# Altium PCB WeatherStation.PcbDoc
Units mm, origin at the board's own origin, x right, y up, seen from the top; angles counter-clockwise.
Board outline 49.97 x 60 mm, 2 copper layers (Top Layer, Bottom Layer); 64 components, 54 nets, 305 pads, 43 vias.
Unrouted connection lines stored in the file: 75.
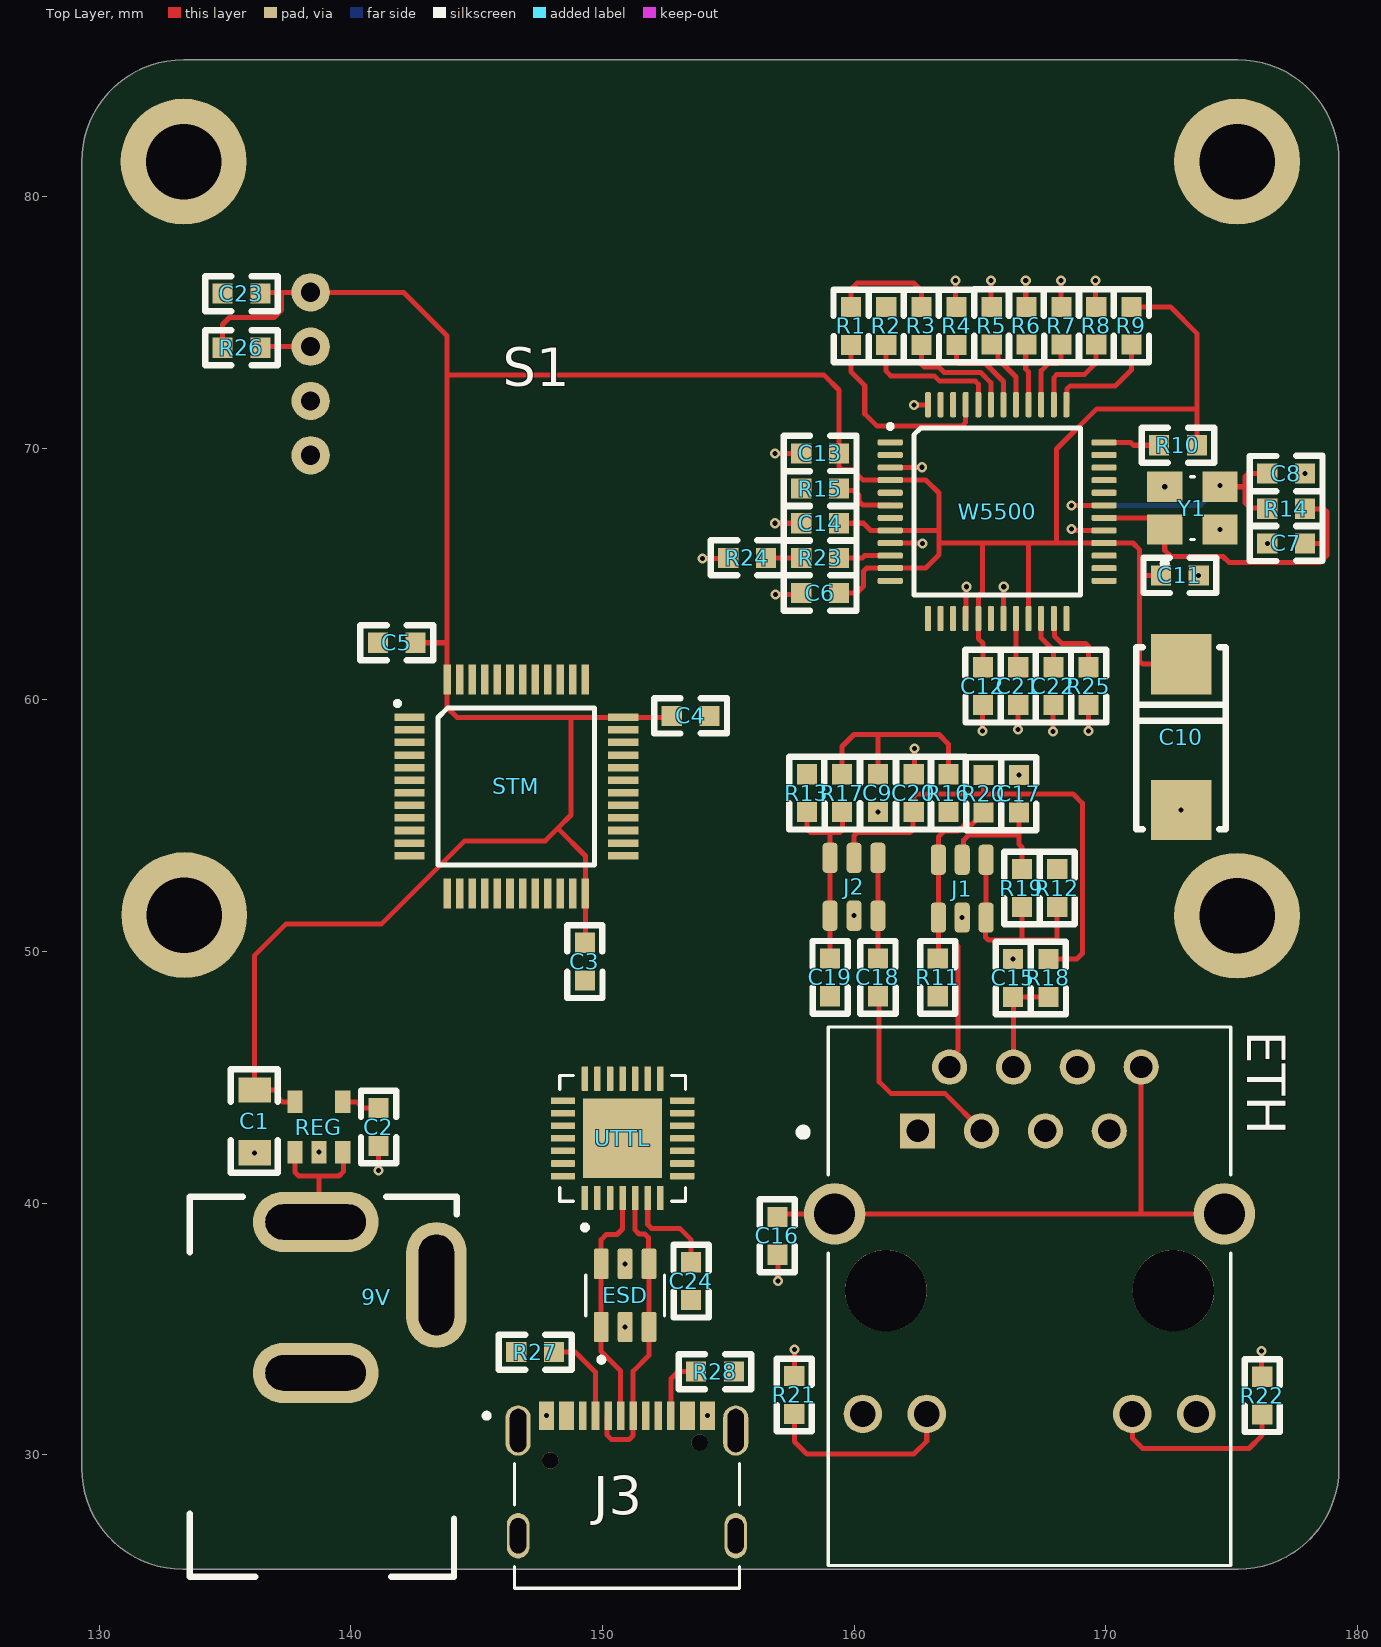
[diagram p0: Top Layer view]
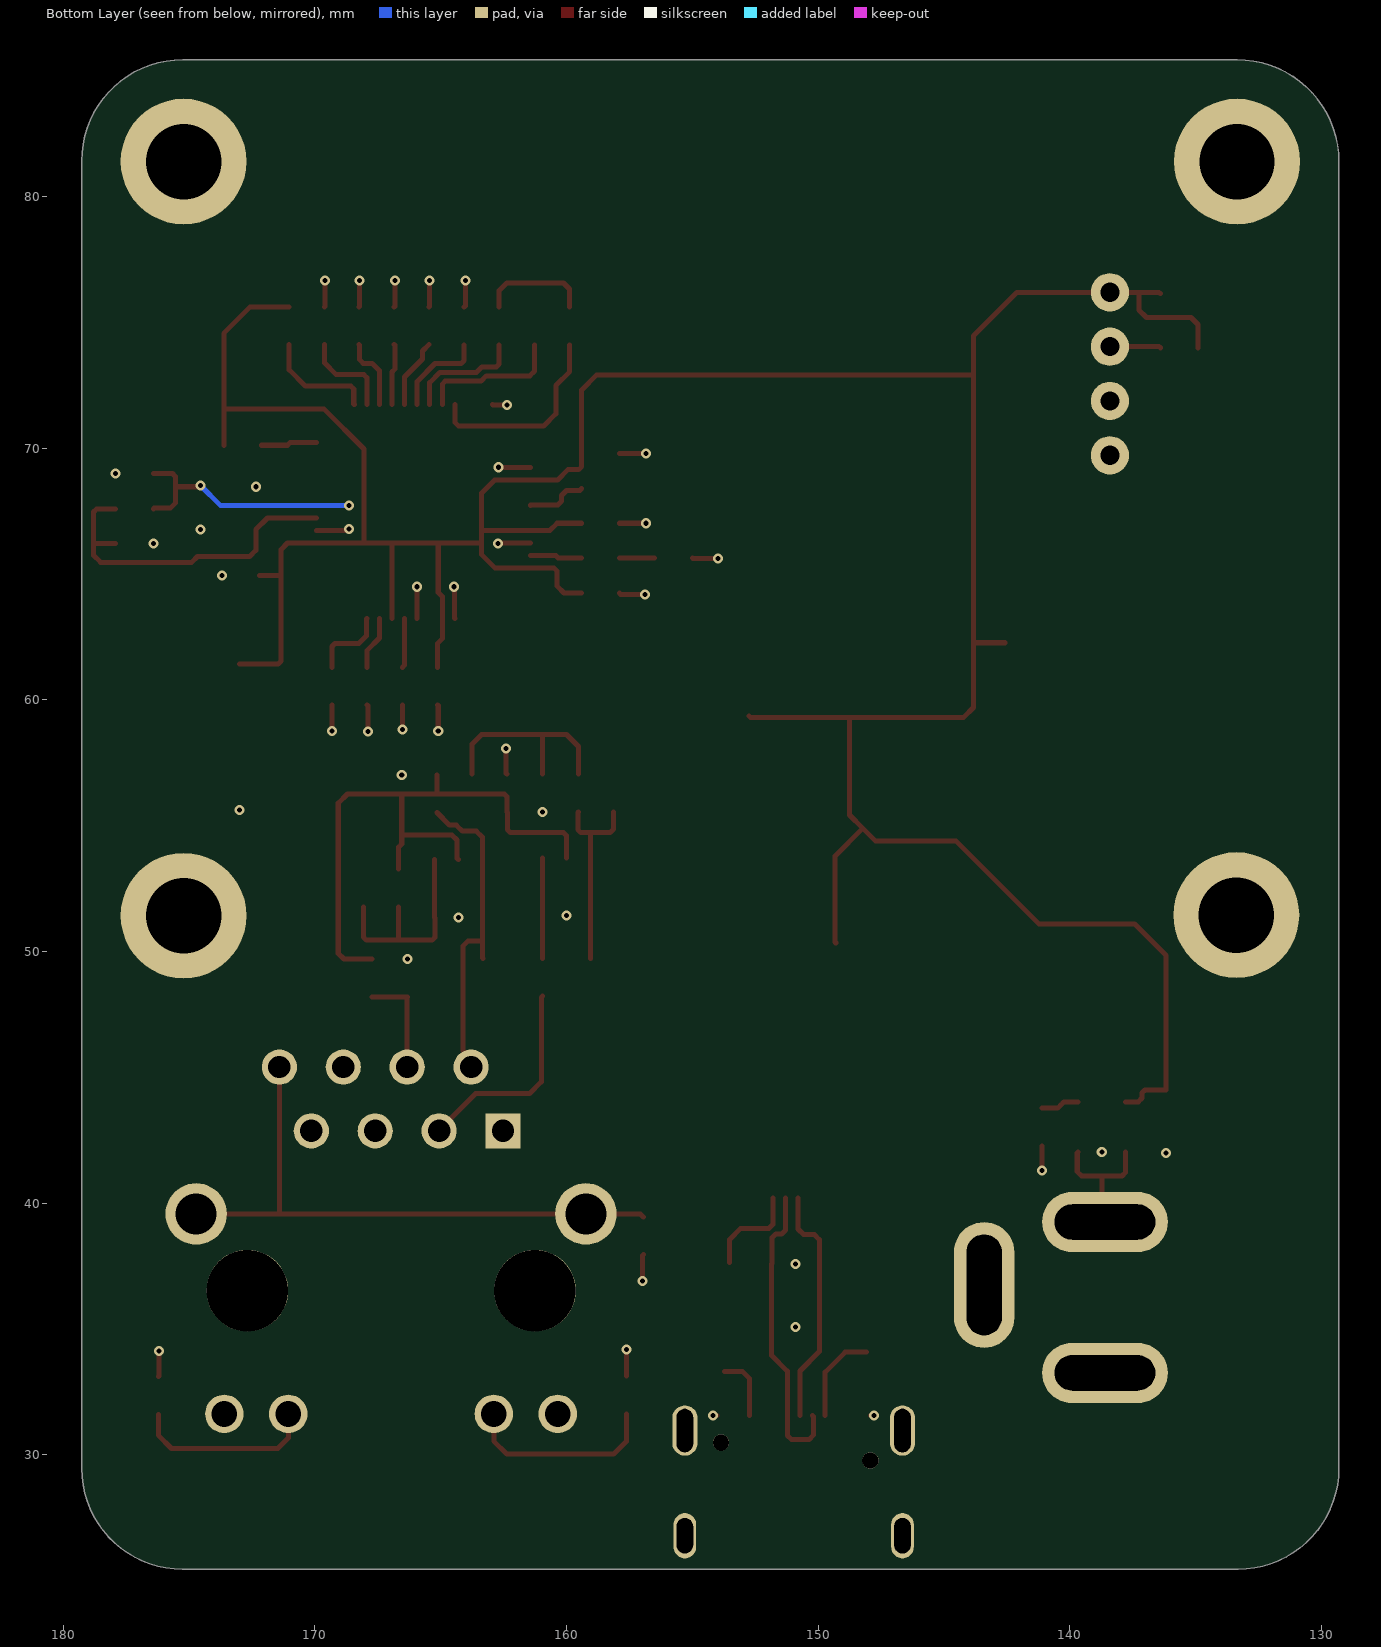
[diagram p1: Bottom Layer view, seen from below]
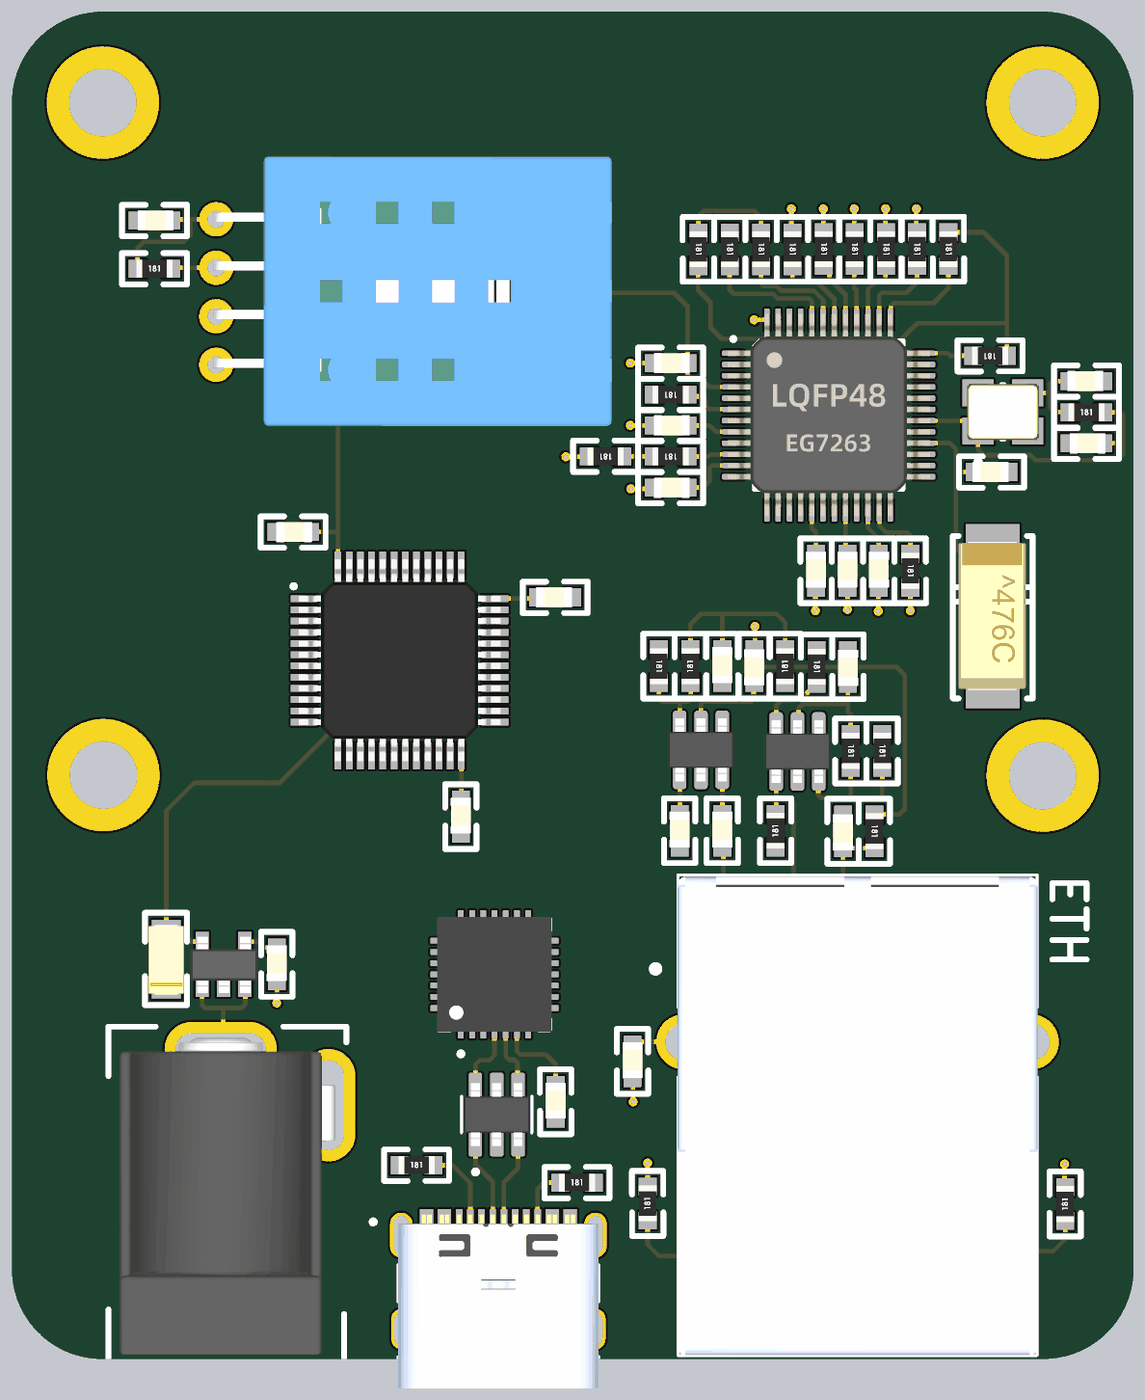
[diagram p2: 3D render of the assembled board from above, using the file's embedded part models]

## Layer stack, top to bottom
Top Solder: solder mask 0.0102, Solder Resist, Dk 3.5
Top Layer: signal copper 0.0356
Dielectric 1: dielectric 0.32, FR-4, Dk 4.8
Bottom Layer: signal copper 0.0356
Bottom Solder: solder mask 0.0102, Solder Resist, Dk 3.5

## Board outline
129.3,29.46 ccw(c133.31,29.46) 133.31,25.45 175.267,25.45 ccw(c175.267,29.455) 179.272,29.455 179.272,81.427 ccw(c175.249,81.427) 175.249,85.45 133.35,85.45 ccw(c133.35,81.4) 129.3,81.4

## Design rules (kind name [scope] priority, off if disabled: settings)
Clearance [All] p1: gap=0.254 ignorepadtopadclearanceinfootprint=FALSE except(0: Arc-Hole Track-Hole SMDPad-Hole THPad-Hole Via-Hole Fill-Hole Poly-Hole Region-Hole Text-Hole; 0.1: SMDPad-SMDPad; 0.15: Arc-Arc Arc-Track Arc-SMDPad Arc-THPad Arc-Via Arc-Fill Arc-Poly Arc-Region Track-Track Track-SMDPad Track-THPad Track-Via Track-Fill Track-Poly Track-Region SMDPad-THPad SMDPad-Via)
PolygonConnect [All] p1: connectstyle=Relief reliefconductorwidth=0.254 reliefentries=4 polygonreliefangle="90 Angle" airgapwidth=0.254
RoutingVias [All] p1: holewidth=0.711 width=1.27 viastyle="Through Hole" minholewidth=0.711 minwidth=1.27 maxholewidth=0.711 maxwidth=1.27
SolderMaskExpansion [All] p1: expansion=0.102 istentingtop=FALSE
Width [All] p1 off: maxlimit=0.254 minlimit=0.254 preferedwidth=0.254
30 further rules are at their usual default settings.

## Components (designator, comment, footprint, x,y, rotation, side; value= is the part's Value field where it differs from the comment)
9V "9V_jack" 9V_JACK 138.6,33.25 r90 top
C1 "2.2uF TAN CAP" "2.2uF TAN CAP" 136.175,42 r90 top
C2 "0603 CAP" "0603 CAP" 141.1,42.275 r90 top
C3 "100nf" "0603 CAP" 149.3,48.85 r90 top
C4 "100nf" "0603 CAP" 154.253,59.367 r180 top
C5 "100nf" "0603 CAP" 141.075,62.275 r0 top
C6 "0603 CAP" "0603 CAP" 157.9,64.25 r0 top
C7 "15pf" "0603 CAP" 176.425,66.225 r0 top
C8 "15pf" "0603 CAP" 177.925,69 r180 top
C9 "10nf" "0603 CAP" 160.95,55.55 r90 top
C10 "10uf" TANTAL_CAP 173,55.625 r90 top
C11 "100nf" "0603 CAP" 173.7,64.95 r180 top
C12 "100nf" "0603 CAP" 165.125,59.8 r90 top
C13 "100nf" "0603 CAP" 157.9,69.8 r0 top
C14 "100nf" "0603 CAP" 157.9,67.025 r0 top
C15 "22nf" "0603 CAP" 166.325,49.7 r270 top
C16 "10nf" "0603 CAP" 156.95,37.95 r90 top
C17 "100nf" "0603 CAP" 166.55,57.025 r270 top
C18 "10nf" "0603 CAP" 160.95,48.225 r90 top
C19 "10nf" "0603 CAP" 159.05,48.225 r90 top
C20 "100nf" "0603 CAP" 162.375,57.05 r270 top
C21 "4u7f" "0603 CAP" 166.525,59.8 r90 top
C22 "10nf" "0603 CAP" 167.925,59.8 r90 top
C23 "100nf" "0603 CAP" 134.9,76.15 r0 top
C24 "100nf" "0603 CAP" 153.525,36.15 r90 top
ESD "USBLC6-2SC6" SOT95P280X145-6N 150.9,36.33 r90 top
ETH "HR911105A" HANRUN_HR911105A 166.975,36.52 r180 top
J1 "USBLC6-4SC6" SOT23-6L 164.3,52.5 r0 top
J2 "USBLC6-4SC6" SOT23-6L 160,52.575 r0 top
J3 "CSP-USC16-TR" VALCON_CSP-USC16-TR 150.972,31.55 r0 top
R1 "10k" "0603 RES" 159.883,74.116 r90 top
R2 "10k" "0603 RES" 161.28,74.116 r90 top
R3 "10k" "0603 RES" 162.677,74.116 r90 top
R4 "10k" "0603 RES" 164.074,74.116 r90 top
R5 "10k" "0603 RES" 165.475,74.125 r90 top
R6 "10k" "0603 RES" 166.85,74.125 r90 top
R7 "10k" "0603 RES" 168.25,74.125 r90 top
R8 "10k" "0603 RES" 169.625,74.125 r90 top
R9 "10k" "0603 RES" 171.025,74.125 r90 top
R10 "0603 RES" "0603 RES" 172.125,70.125 r0 top
R11 "22R" "0603 RES" 163.325,49.725 r270 top
R12 "22R" "0603 RES" 168.075,51.775 r90 top
R13 "22R" "0603 RES" 158.125,55.55 r90 top
R14 "1M" "0603 RES" 177.925,67.6 r180 top
R15 "22R" "0603 RES" 157.9,68.4 r0 top
R16 "47R" "0603 RES" 163.75,57.05 r270 top
R17 "47R" "0603 RES" 159.525,57.05 r270 top
R18 "10R" "0603 RES" 167.725,48.2 r90 top
R19 "47R" "0603 RES" 166.675,51.775 r90 top
R20 "47R" "0603 RES" 165.15,55.525 r90 top
R21 "330R" "0603 RES" 157.625,33.125 r270 top
R22 "330R" "0603 RES" 176.225,33.1 r270 top
R23 "0603 RES" "0603 RES" 157.9,65.65 r0 top
R24 "0603 RES" "0603 RES" 155,65.65 r0 top
R25 "10K" "0603 RES" 169.325,59.8 r90 top
R26 "0603 RES" "0603 RES" 136.4,74 r180 top
R27 "0603 RES" "0603 RES" 148.075,34.075 r180 top
R28 "0603 RES" "0603 RES" 155.225,33.3 r180 top
REG "3.3v reg" "3.3v reg" 137.775,42.025 r0 top
S1 "DHT11" DHT11 138.4,76.205 r270 top
STM "STM32F103C8T6" STM32F103C8T6 142.324,59.311 r0 top
UTTL "CP2102" QFN50P500X500X100-29N 150.8,42.575 r90 top
W5500 "W5500" W5500 161.439,70.237 r0 top
Y1 "7M25090002" XTAL_7M25090002 173.45,67.625 r90 top

## Footprints (in the part's own frame and the unit in brackets; to place one, negate y for a bottom-side part, rotate by r counter-clockwise, add the part's x,y. Pads: shape width x height; smd on the part's side, far side on the other; paste and mask are expansions set on the pad)
"2.2uF TAN CAP" [mm]
  rect 1x1.3 smd: 1(0,0) 2(2.5,0)
  silkscreen extent -0.79,-0.93 3.32,0.95, body extent -0.33,-0.8 2.77,0.8, height 1.31
"3.3v reg" [mm]
  rect 0.6x0.9 smd: 1(0,0) 2(0.95,0) 3(1.9,0) 4(1.9,2) 5(0,2)
  body extent -0.52,-0.27 2.48,2.23, height 1.1
9V_JACK [mm]
  oval 2.4x5 hole 4 slot 1.4 at 0 deg: 1(6,0) 3(0,0)
  oval 5x2.4 hole 1.4 slot 4 at 0 deg: 2(3.5,-4.8)
  silkscreen extent -8.1,-5.6 7,5, body extent -7.6,-5.1 6.5,4.5, height 11
"0603 CAP" [mm]
  rect 0.8x0.8 smd: 1(0,0) 2(1.5,0)
  silkscreen extent -0.7,-0.7 2.2,0.7, body extent 0,-0.45 1.6,0.45, height 0.8
"0603 RES" [mm]
  rect 0.8x0.8 smd: 1(0,0) 2(1.5,0)
  silkscreen extent -0.7,-0.7 2.2,0.7, body extent -0.05,-0.4 1.55,0.4, height 0.45
DHT11 [mil]
  round 60 hole 30: 1(0,0) 2(85.04,0) 3(170.08,0) 4(255.12,0)
  body extent -110,-5 362,694, height 228
HANRUN_HR911105A [mm]
  rect 1.398x1.398 / inner round 1.398 / far side rect 1.398x1.398 hole 0.89: 1(4.45,-6.35)
  round 1.398 hole 0.89: 2(3.18,-8.89) 3(1.91,-6.35) 4(0.64,-8.89) 5(-0.63,-6.35) 6(-1.9,-8.89) 7(-3.17,-6.35) 8(-4.44,-8.89)
  round 1.53 hole 1.02: 9(6.625,4.9) 10(4.085,4.9) 11(-4.085,4.9) 12(-6.625,4.9)
  round 2.445 hole 1.63: 15(7.745,-3.05) 16(-7.745,-3.05)
  round 3.25 hole 3.25 unplated: ""(-5.715,0) ""(5.715,0)
  silkscreen extent -8,-10.48 9.15,10.92, body extent -8.02,-10.4 8.02,10.9, height 13.5
QFN50P500X500X100-29N [mm]
  rrect25% 0.97x0.26 smd: 1(-2.37,1.5) 2(-2.37,1) 3(-2.37,0.5) 4(-2.37,0) 5(-2.37,-0.5) 6(-2.37,-1) 7(-2.37,-1.5) 15(2.37,-1.5) 16(2.37,-1) 17(2.37,-0.5) 18(2.37,0) 19(2.37,0.5) 20(2.37,1) 21(2.37,1.5)
  rrect25% 0.26x0.97 smd: 8(-1.5,-2.37) 9(-1,-2.37) 10(-0.5,-2.37) 11(0,-2.37) 12(0.5,-2.37) 13(1,-2.37) 14(1.5,-2.37) 22(1.5,2.37) 23(1,2.37) 24(0.5,2.37) 25(0,2.37) 26(-0.5,2.37) 27(-1,2.37) 28(-1.5,2.37)
  rect 3.15x3.15 smd paste-0.575: 29(0,0)
  silkscreen extent -3.64,-2.5 2.5,2.5, body extent -2.55,-2.55 2.55,2.55, height 1
SOT23-6L [mm]
  rrect50% 0.6x1.2 smd: 1(-0.95,-1.15) 2(0,-1.15) 3(0.95,-1.15) 4(0.95,1.15) 5(0,1.15) 6(-0.95,1.15)
  body extent -1.46,-1.4 1.46,1.4, height 1.4
SOT95P280X145-6N [mm]
  rrect25% 1.21x0.59 smd: 1(-1.255,0.95) 2(-1.255,0) 3(-1.255,-0.95) 4(1.255,-0.95) 5(1.255,0) 6(1.255,0.95)
  silkscreen extent -2.65,-1.57 0.81,1.57, body extent -1.4,-1.46 1.4,1.46, height 1.4
STM32F103C8T6 [mm]
  rect 1.2x0.3 smd: 1(0,0) 2(0,-0.5) 3(0,-1) 4(0,-1.5) 5(0,-2) 6(0,-2.5) 7(0,-3) 8(0,-3.5) 9(0,-4) 10(0,-4.5) 11(0,-5) 12(0,-5.5) 25(8.5,-5.5) 26(8.5,-5) 27(8.5,-4.5) 28(8.5,-4) 29(8.5,-3.5) 30(8.5,-3) 31(8.5,-2.5) 32(8.5,-2) 33(8.5,-1.5) 34(8.5,-1) 35(8.5,-0.5) 36(8.5,0)
  rect 0.3x1.2 smd: 13(1.5,-7) 14(2,-7) 15(2.5,-7) 16(3,-7) 17(3.5,-7) 18(4,-7) 19(4.5,-7) 20(5,-7) 21(5.5,-7) 22(6,-7) 23(6.5,-7) 24(7,-7) 37(7,1.5) 38(6.5,1.5) 39(6,1.5) 40(5.5,1.5) 41(5,1.5) 42(4.5,1.5) 43(4,1.5) 44(3.5,1.5) 45(3,1.5) 46(2.5,1.5) 47(2,1.5) 48(1.5,1.5)
  silkscreen extent -0.53,-5.86 7.36,0.61, body extent -0.25,-7.25 8.75,1.75, height 1.6
TANTAL_CAP [mm]
  rect 2.4x2.4 smd: 1(0,0) 2(5.8,0)
  silkscreen extent -0.76,-1.78 6.48,1.78, body extent -0.38,-1.48 6.22,1.52, height 2.38
VALCON_CSP-USC16-TR [mm]
  rect 0.3x1.14 smd: A1(-3.35,0) A4(-2.55,0) A5(-1.25,0) A6(-0.25,0) A7(0.25,0) A8(1.25,0) A9(2.55,0) A12(3.35,0) B1(3.05,0) B4(2.25,0) B5(1.75,0) B6(0.75,0) B7(-0.75,0) B8(-1.75,0) B9(-2.25,0) B12(-3.05,0)
  oval 1x2 hole 0.65 slot 1.72 at 90 deg: S1(-4.325,-0.59) S2(4.325,-0.59)
  oval 0.9x1.8 hole 0.65 slot 1.4 at 90 deg: S3(-4.325,-4.77) S4(4.325,-4.77)
  round 0.65 hole 0.65 unplated: ""(-3.048,-1.778) ""(2.89,-1.07)
  silkscreen extent -5.67,-6.86 4.47,0.1, body extent -4.47,-7.42 4.47,0.33, height 3.26
W5500 [mm]
  rrect50% 1x0.24 smd: 1(0,0) 2(0,-0.5) 3(0,-1) 4(0,-1.5) 5(0,-2) 6(0,-2.5) 7(0,-3) 8(0,-3.5) 9(0,-4) 10(0,-4.5) 11(0,-5) 12(0,-5.5) 25(8.5,-5.5) 26(8.5,-5) 27(8.5,-4.5) 28(8.5,-4) 29(8.5,-3.5) 30(8.5,-3) 31(8.5,-2.5) 32(8.5,-2) 33(8.5,-1.5) 34(8.5,-1) 35(8.5,-0.5) 36(8.5,0)
  rrect50% 0.24x1 smd: 13(1.5,-7) 14(2,-7) 15(2.5,-7) 16(3,-7) 17(3.5,-7) 18(4,-7) 19(4.5,-7) 20(5,-7) 21(5.5,-7) 22(6,-7) 23(6.5,-7) 24(7,-7) 37(7,1.5) 38(6.5,1.5) 39(6,1.5) 40(5.5,1.5) 41(5,1.5) 42(4.5,1.5) 43(4,1.5) 44(3.5,1.5) 45(3,1.5) 46(2.5,1.5) 47(2,1.5) 48(1.5,1.5)
  silkscreen extent -0.05,-6.06 7.56,0.68, body extent -0.26,-7.26 8.76,1.76, height 1.6
XTAL_7M25090002 [mm]
  rect 1.2x1.4 smd: 1(-0.85,1.1) 2(-0.85,-1.1) 3(0.85,-1.1) 4(0.85,1.1)
  silkscreen extent -2.3,-0.08 1.25,1.2, body extent -1.25,-1.6 1.25,1.6, height 0.8

## Part data
9V: library part 9V_JACK
C3 C4 C5 C7 C8 C9 C11 C12 C13 C14 C15 C16 C17 C18 C19 C20 C21 C22 C23 C24: library part "0603 CAP"
C10: library part tan_cap
ESD: "17V Clamp 5A (8/20Âµs) Ipp Tvs Diode Surface Mount SOT-23-6", Package="SOT-23-6 STMicroelectronics", Availability="In Stock", Check_prices=https://www.snapeda.com/parts/USBLC6-2SC6/STMicroelectronics/view-part/?ref=eda, MF=STMicroelectronics, MP=USBLC6-2SC6, Price=None, Purchase-URL=https://pricing.snapeda.com/search/part/USBLC6-2SC6/?ref=eda, SnapEDA_Link=https://www.snapeda.com/parts/USBLC6-2SC6/STMicroelectronics/view-part/?ref=snap
ETH: "DIP RJ45 Connector;", Package=None, Availability="Not in stock", Check_prices=https://www.snapeda.com/parts/HR911105A/HanRun/view-part/?ref=eda, MF=hanrun, MP=HR911105A, Price=None, SnapEDA_Link=https://www.snapeda.com/parts/HR911105A/HanRun/view-part/?ref=snap
J1 J2: "17V Clamp 5A (8/20µs) Ipp Tvs Diode Surface Mount SOT-23-6", Package="SOT-23-6 STMicroelectronics", Check_prices=https://www.snapeda.com/parts/USBLC6-4SC6/STMicroelectronics/view-part/?ref=eda, MF=STMicroelectronics, MP=USBLC6-4SC6, SnapEDA_Link=https://www.snapeda.com/parts/USBLC6-4SC6/STMicroelectronics/view-part/?ref=snap
J3: "CSP-USC16-TR Valcon USB Type C Surface Mount PCB Socket", Package=None, Availability="In Stock", Check_prices=https://www.snapeda.com/parts/CSP-USC16-TR/Valcon/view-part/?ref=eda, MF=Valcon, MP=CSP-USC16-TR, Price=None, Purchase-URL=https://pricing.snapeda.com/search/part/CSP-USC16-TR/?ref=eda, SnapEDA_Link=https://www.snapeda.com/parts/CSP-USC16-TR/Valcon/view-part/?ref=snap
R1 R2 R3 R4 R5 R6 R7 R8 R9 R11 R12 R13 R14 R15 R16 R17 R18 R19 R20 R21 R22 R25: library part "0603 RES"
UTTL: "CP2102N USB 2.0 to UART (RS232) Bridge Interface Evaluation Board", Package="WFQFN-20 Silicon Labs", Availability="In Stock", Check_prices=https://www.snapeda.com/parts/CP2102/Silicon+Labs/view-part/?ref=eda, MF="Silicon Labs", MP=CP2102, Price=None, Purchase-URL=https://pricing.snapeda.com/search/part/CP2102/?ref=eda, SnapEDA_Link=https://www.snapeda.com/parts/CP2102/Silicon+Labs/view-part/?ref=snap
Y1: "25 MHz Â±10ppm Crystal 18pF 4-SMD, No Lead", Package="SMD-4 TXC", Availability="In Stock", Check_prices=https://www.snapeda.com/parts/7M25090002/TXC/view-part/?ref=eda, MF=TXC, MP=7M25090002, Price=None, Purchase-URL=https://pricing.snapeda.com/search/part/7M25090002/?ref=eda, SnapEDA_Link=https://www.snapeda.com/parts/7M25090002/TXC/view-part/?ref=snap

## Free pads (board coordinates)
  round 5 hole 3: 21(133.35,81.4) 21(133.375,51.45) 21(175.225,51.425) 21(175.225,81.4)

## Via types
v1: diameter 0.4, hole 0.2, Top Layer to Bottom Layer, 43 vias

## Nets (pads, with @x,y where several pads share a name; then routed paths per layer and width w, separated by ;. In a path a pad name is that pad's centre, name@x,y a point inside that pad or via, vN(x,y) a via of type N, cw(c..) or ccw(c..) an arc to the next point about the centre after c; other vN are vias at no path point)
3.3V: C1.2 C3.2 C4.2 C5.2 C6.2 C10.2 C11.2 C12.2 C13.2 C14.2 C23.2 R9.2 R10.2 R26.2 REG.5 S1.1 STM.24 STM.36 STM.48 W5500.4 W5500.8 W5500.11 W5500.15 W5500.17 W5500.21 W5500.28 | length 145.6
  Top Layer w0.2: R26.2 134.9,74.925 135.175,75.2 136.95,75.2 137.25,75.5 137.25,76.18 137.225,76.205 ; C23.2 136.455,76.205 137.225,76.205 ; REG.5 137.275,44.025 137.125,44.175 137.125,44.383 137.008,44.5 C1.2 136.175,49.85 137.425,51.1 141.225,51.1 144.525,54.4 147.725,54.4 148.225,54.9 ; C5.2 143.725,62.275 ; 149.15,59.3 150.813,59.3 STM.36 ; C3.2 149.324,50.374 STM.24 149.324,53.801 148.225,54.9 ; C4.2 152.697,59.311 STM.36 ; C6.2 160.1,64.25 160.375,64.525 160.375,65.12 160.492,65.237 W5500.11 162.837,65.237 163.375,65.775 163.375,66.331 ; C14.2 160.375,67.025 160.663,66.737 W5500.8 163.375,66.737 ; 165.1,66.225 165.1,64.275 164.939,64.114 W5500.17 164.939,62.436 165.125,62.25 C12.2 ; W5500.21 166.939,66.223 166.925,66.237 ; W5500.28@169.939,66.236 171.088,66.236 171.353,65.972 171.353,64.95 ; W5500.28 168.05,66.237 ; R9.2 172.575,75.625 173.625,74.575 173.625,71.575 ; C11.2 171.353,64.95 ; C10.2 171.47,61.425 171.353,61.542 171.353,64.95 ; R10.2 173.625,71.575 ; 137.225,76.205 S1.1 142.095,76.205 143.824,74.476 143.824,72.975 ; 143.824,72.975 STM.48 143.824,59.701 144.214,59.311 148.75,59.311 ; 143.824,72.975 143.874,72.925 158.8,72.925 159.4,72.325 C13.2 159.4,69.271 159.517,69.154 159.947,69.154 160.364,68.737 W5500.4 162.863,68.737 163.375,68.225 163.375,66.737 ; 148.225,54.9 148.75,55.425 148.75,59.311 ; 148.75,59.311 STM.36 ; 163.375,66.331 163.375,66.737 ; 163.375,66.331 163.469,66.237 166.925,66.237 ; 166.925,66.237 168.05,66.237 ; 168.05,66.237 168.05,69.975 169.65,71.575 173.625,71.575
3.3Va: C17.2 C20.2 J1.5 J2.5 R1.2 R3.2 R18.2 R19.2 R20.2 | length 30.3
  Top Layer w0.2: R1.2 159.883,76.333 160.125,76.575 162.375,76.575 162.677,76.273 R3.2 ; J2.5 160,54.608 160.117,54.725 162.233,54.725 162.35,54.842 162.35,55.525 C20.2 162.375,56.165 162.475,56.265 165.15,56.265 ; J1.5 164.356,53.706 164.356,54.431 164.55,54.625 166.55,54.625 ; R20.2@165.155,57.02 R20.2 165.15,56.265 ; R19.2 166.675,54.15 166.55,54.275 166.55,54.625 ; R18.2 168.85,49.7 169.075,49.925 169.075,55.9 168.71,56.265 166.525,56.265 ; 165.15,56.265 166.525,56.265 ; 166.525,56.265 166.55,56.24 C17.2 166.55,54.625
9v: 9V.1 REG.1 REG.3 | length 5.5
  Top Layer w0.2: REG.1 137.775,41.225 137.925,41.075 138.725,41.075 ; 9V.1 9V.1@138.9,39.55 ; 9V.1@138.725,39.675 138.725,41.075 ; REG.3 139.7,42 139.7,41.25 139.525,41.075 138.725,41.075
ACTLED: ETH.12 W5500.27
D+: ESD.1 ESD.6 J3.A6 J3.B6 UTTL.4 | length 9.6
  Top Layer w0.2: J3.A6 150.722,33.328 149.95,34.1 ESD.1 149.95,35.925 ESD.6 149.95,38.55 150.15,38.75 150.575,38.75 150.8,38.975 UTTL.4
D-: ESD.3 ESD.4 J3.A7 J3.B7 UTTL.5 | length 12
  Top Layer w0.2: J3.B7 150.188,31.516 150.188,30.775 150.366,30.597 151.054,30.597 151.222,30.765 J3.A7 151.222,33.322 151.85,33.95 ESD.3 ESD.4 151.825,37.61 151.825,38.63 151.68,38.775 151.45,38.775 151.3,38.925 UTTL.5
DHT11_PIN: R26.1 S1.2 | length 2
  Top Layer w0.2: R26.1 136.445,74.045 S1.2
GND: 9V.2 9V.3 C1.1 C2.1 C3.1 C4.1 C5.1 C6.1 C7.1 C8.1 C9.1 C10.1 C11.1 C12.1 C13.1 C14.1 C15.1 C16.1 C17.1 C20.1 C21.1 C22.1 C23.1 C24.1 ESD.2 ESD.5 J1.2 J2.2 J3.A1 J3.A12 J3.B1 J3.B12 J3.S1 J3.S2 J3.S3 J3.S4 R4.2 R5.2 R6.2 R7.2 R8.2 R21.1 R22.1 R24.1 R25.1 R27.2 R28.1 REG.2 S1.4 STM.23 STM.35 STM.47 UTTL.3 UTTL.29 W5500.3 W5500.9 W5500.14 W5500.16 W5500.19 W5500.29 W5500.48 Y1.2 Y1.4 | length 25.8
  Top Layer w0.2: v1(141.1,41.3) C2.1 ; v1(153.975,65.625) 154.975,65.625 R24.1 ; v1(156.85,67.025) C14.1 ; v1(156.85,69.8) C13.1 ; v1(156.875,64.2) 157.85,64.2 C6.1 ; C16.1 156.975,37.925 v1(156.975,36.9) ; R21.1 v1(157.625,34.175) ; W5500.9 161.445,66.231 162.719,66.231 v1(162.725,66.225) ; W5500.3 161.446,69.243 162.693,69.243 v1(162.7,69.25) ; C20.1 162.4,57.075 v1(162.4,58.071) ; v1(162.375,71.725) 162.927,71.725 W5500.48 ; v1(164.025,76.675) 164.025,75.665 R4.2 ; W5500.16 164.457,63.255 164.457,64.482 v1(164.475,64.5) ; v1(165.1,58.775) 165.1,59.775 C12.1 ; v1(165.45,76.675) 165.45,75.65 R5.2 ; W5500.19 165.945,63.242 165.945,64.495 v1(165.95,64.5) ; C17.1@166.525,57.05 v1(166.55,57.025) ; v1(166.525,58.825) C21.1 ; v1(166.825,76.675) 166.825,75.65 R6.2 ; v1(167.9,58.75) 167.9,59.775 C22.1 ; v1(168.225,76.675) 168.225,75.65 R7.2 ; v1(168.65,66.791) 168.71,66.731 169.933,66.731 W5500.29 ; v1(169.325,58.775) R25.1 ; v1(169.6,76.675) 169.6,75.65 R8.2 ; v1(176.2,34.125) 176.2,33.125 R22.1
  other v1: 147.772,31.55 154.172,31.55 150.9,35.075 150.9,37.585 136.175,42 138.725,42.025 166.325,49.7 164.3,51.35 160,51.425 160.95,55.55 173,55.625 173.7,64.95 176.425,66.225 174.55,66.775 172.35,68.475 177.925,69
LINKLED: ETH.9 W5500.25
MISO: W5500.34
MOSI: W5500.35
NetC2_2: C2.2 REG.4 | length 1.5
  Top Layer w0.2: REG.4 140.228,44.025 140.359,43.894 140.359,43.892 140.476,43.775 C2.2
NetC7_2: C7.2 R14.1 W5500.30 Y1.1 | length 13.7
  Top Layer w0.2: W5500.30 171.888,67.237 Y1.1 172.35,65.95 172.596,65.704 174.667,65.704 174.9,65.471 178.521,65.471 178.8,65.75 178.8,66.275 ; C7.2 178.75,66.225 178.8,66.275 ; R14.1 178.675,67.6 178.8,67.475 178.8,66.275
NetC8_2: C8.2 R14.2 W5500.31 Y1.3 | length 11.5
  Top Layer w0.2: v1(168.65,67.725) 168.656,67.731 169.933,67.731 W5500.31 ; Y1.3 175.55,68.475 ; R14.2 176.4,67.625 175.75,67.625 175.55,67.825 175.55,68.475 ; C8.2 175.667,69 175.55,68.883 175.55,68.475
  Bottom Layer w0.2: v1(168.65,67.725) 173.75,67.725 v1(174.55,68.525)
NetC9_2: C9.2 ETH.5 R16.1 R17.1 | length 8.5
  Top Layer w0.2: R17.1 159.525,58.15 160,58.625 160.975,58.625 ; C9.2 160.95,58.6 160.975,58.625 ; R16.1 163.75,58.25 163.375,58.625 160.975,58.625
NetC15_2: C15.2 ETH.4 R18.1 | length 4.2
  Top Layer w0.2: ETH.4 166.335,48.19 C15.2 R18.1
NetC16_2: C16.2 ETH.8 ETH.15 ETH.16 | length 23.7
  Top Layer w0.2: C16.2 157.07,39.57 ETH.15 171.415,39.57 ; ETH.8 171.415,39.57 ; ETH.16 171.415,39.57
NetC18_1: C18.1 ETH.3 | length 8.3
  Top Layer w0.2: C18.1 161,48.175 161,44.825 161.475,44.35 163.62,44.35 165.065,42.905 ETH.3
NetC18_2: C18.2 J2.3 J2.4 R15.1 R16.2 | length 4
  Top Layer w0.2: C18.2 J2.3 J2.4
NetC19_1: C19.1 ETH.6
NetC19_2: C19.2 J2.1 J2.6 R13.1 R17.2 | length 7.9
  Top Layer w0.2: R13.1 158.125,54.875 158.275,54.725 159.1,54.725 ; C19.2 J2.1 J2.6 159.05,54.675 159.1,54.725 ; R17.2 159.55,55.525 159.55,54.842 159.433,54.725 159.1,54.725
NetC21_2: C21.2 W5500.20 | length 2
  Top Layer w0.2: W5500.20 166.439,61.386 C21.2
NetC22_2: C22.2 W5500.22 | length 2.1
  Top Layer w0.2: W5500.22 167.439,62.461 167.925,61.975 C22.2
NetC24_2: C24.2 UTTL.6 | length 3.9
  Top Layer w0.2: UTTL.6 151.8,39.15 151.95,39 153.075,39 153.525,38.55 C24.2
NetETH_1: ETH.1 J1.3 J1.4 R12.1 R19.1 | length 8.6
  Top Layer w0.2: J1.4 J1.3 165.225,51.325 165.225,50.567 165.342,50.45 165.774,50.45 165.778,50.454 166.65,50.454 ; R19.1 166.675,50.479 166.65,50.454 ; R12.1 168.075,50.571 167.958,50.454 166.65,50.454
NetETH_2: ETH.2 J1.1 J1.6 R11.1 R20.1 | length 12.8
  Top Layer w0.2: R11.1 163.35,49.75 163.35,50.425 ; ETH.2 163.795,45.734 164.125,46.064 164.125,50.212 163.912,50.425 163.35,50.425 ; R20.1 164.65,55.025 164.379,55.025 164.137,54.784 163.584,54.784 163.35,54.55 J1.6 J1.1 163.35,50.425
NetETH_10: ETH.10 R21.2 | length 7.9
  Top Layer w0.2: R21.2 157.625,30.525 158.125,30.025 162.375,30.025 162.89,30.54 ETH.10
NetETH_11: ETH.11 R22.2 | length 7.3
  Top Layer w0.2: ETH.11 171.06,30.665 171.475,30.25 175.7,30.25 176.225,30.775 R22.2
NetJ3_A5: J3.A5 R27.1 | length 3.7
  Top Layer w0.2: R27.1 148.925,34.075 149.722,33.278 J3.A5
NetJ3_B5: J3.B5 R28.2 | length 2.6
  Top Layer w0.2: J3.B5 152.722,33.022 153,33.3 R28.2
NetLabel50: STM.31
NetLabel51: STM.30
NetR1_1: R1.1 W5500.45 | length 8
  Top Layer w0.2: R1.1 159.875,74.108 159.875,73.05 160.425,72.5 160.425,71.375 160.917,70.883 164.286,70.883 164.439,71.036 W5500.45
NetR2_1: R2.1 W5500.44 | length 5.7
  Top Layer w0.2: R2.1 161.275,74.111 161.275,73.067 161.459,72.884 163.191,72.884 163.403,72.671 164.822,72.671 164.939,72.554 W5500.44
NetR3_1: R3.1 W5500.43 | length 4.7
  Top Layer w0.2: R3.1 162.677,73.351 162.794,73.234 163.366,73.234 163.579,73.021 165.029,73.021 165.439,72.611 W5500.43
NetR4_1: R4.1 W5500.42 | length 3.8
  Top Layer w0.2: R4.1 164.074,73.488 164.191,73.371 165.229,73.371 165.939,72.661 W5500.42
NetR5_1: R5.1 W5500.41 | length 2.8
  Top Layer w0.2: R5.1 165.725,73.875 165.725,73.55 166.439,72.836 W5500.41
NetR6_1: R6.1 W5500.40 | length 2.4
  Top Layer w0.2: R6.1 166.825,74.1 166.825,73.15 166.939,73.036 W5500.40
NetR7_1: R7.1 W5500.39 | length 2.9
  Top Layer w0.2: W5500.39 167.439,73.089 167.733,73.383 168.083,73.383 168.225,73.525 168.225,74.1 R7.1
NetR8_1: R8.1 W5500.38 | length 3.7
  Top Layer w0.2: W5500.38 167.939,72.812 168.056,72.929 169.154,72.929 169.625,73.4 R8.1
NetR9_1: R9.1 W5500.37 | length 4.5
  Top Layer w0.2: W5500.37 168.459,71.757 168.459,72.358 168.576,72.475 170.375,72.475 171.025,73.125 R9.1
NetR11_2: R11.2 W5500.1
NetR12_2: R12.2 W5500.2
NetR13_2: R13.2 W5500.5
NetR15_2: R15.2 W5500.6 | length 2.4
  Top Layer w0.2: R15.2 159.475,68.325 160,68.325 160.2,68.125 160.2,67.9 160.35,67.75 161.426,67.75 W5500.6
NetR23_1: R23.1 R24.2 | length 1.4
  Top Layer w0.2: R24.2 R23.1
NetR23_2: R23.2 W5500.10 | length 2.1
  Top Layer w0.2: R23.2 160.336,65.65 160.423,65.737 W5500.10
NetR25_2: R25.2 W5500.23 | length 3.1
  Top Layer w0.2: W5500.23 167.959,63.217 167.959,62.541 168.25,62.25 169.2,62.25 169.325,62.125 R25.2
RX: UTTL.25
SCLK: W5500.33
TX: UTTL.26
VBUS: J3.A4 J3.A9 J3.B4 J3.B9 UTTL.8
W5500_CS: W5500.32
W5500_INT: R10.1 W5500.36 | length 2.2
  Top Layer w0.2: W5500.36 170.988,70.237 171.1,70.125 R10.1
pads on no net: ETH. ETH.7 J3. J3.A8 J3.B8 R2.2 S1.3 STM.1 STM.2 STM.3 STM.4 STM.5 STM.6 STM.7 STM.8 STM.9 STM.10 STM.11 STM.12 STM.13 STM.14 STM.15 STM.16 STM.17 STM.18 STM.19 STM.20 STM.21 STM.22 STM.25 STM.26 STM.27 STM.28 STM.29 STM.32 STM.33 STM.34 STM.37 STM.38 STM.39 STM.40 STM.41 STM.42 STM.43 STM.44 STM.45 STM.46 UTTL.1 UTTL.2 UTTL.7 UTTL.9 UTTL.10 UTTL.11 UTTL.12 UTTL.13 UTTL.14 UTTL.15 UTTL.16 UTTL.17 UTTL.18 UTTL.19 UTTL.20 UTTL.21 UTTL.22 UTTL.23 UTTL.24 UTTL.27 UTTL.28 W5500.7 W5500.12 W5500.13 W5500.18 W5500.24 W5500.26 W5500.46 W5500.47
copper on no net: | length 0.3
  Top Layer w0.2: 147.772,31.55 147.922,31.55 ; 154.022,31.55 154.172,31.55

## Silkscreen, mask and mechanical layers (free items; w line width, h text height)
Mechanical 1:
  the board outline again, w0.254

## Text inside footprints (layer, text, board x,y; h text height)
J3: Mechanical 13 "PCB Edge" at 148.902,24.95 h0.7